# Altium PCB Control Board mk2.PcbDoc
Units mm, origin at the board's own origin, x right, y up, seen from the top; angles counter-clockwise.
Board outline 89 x 55 mm, 2 copper layers (Top Layer, Bottom Layer); 24 components, 21 nets, 99 pads, 7 vias.
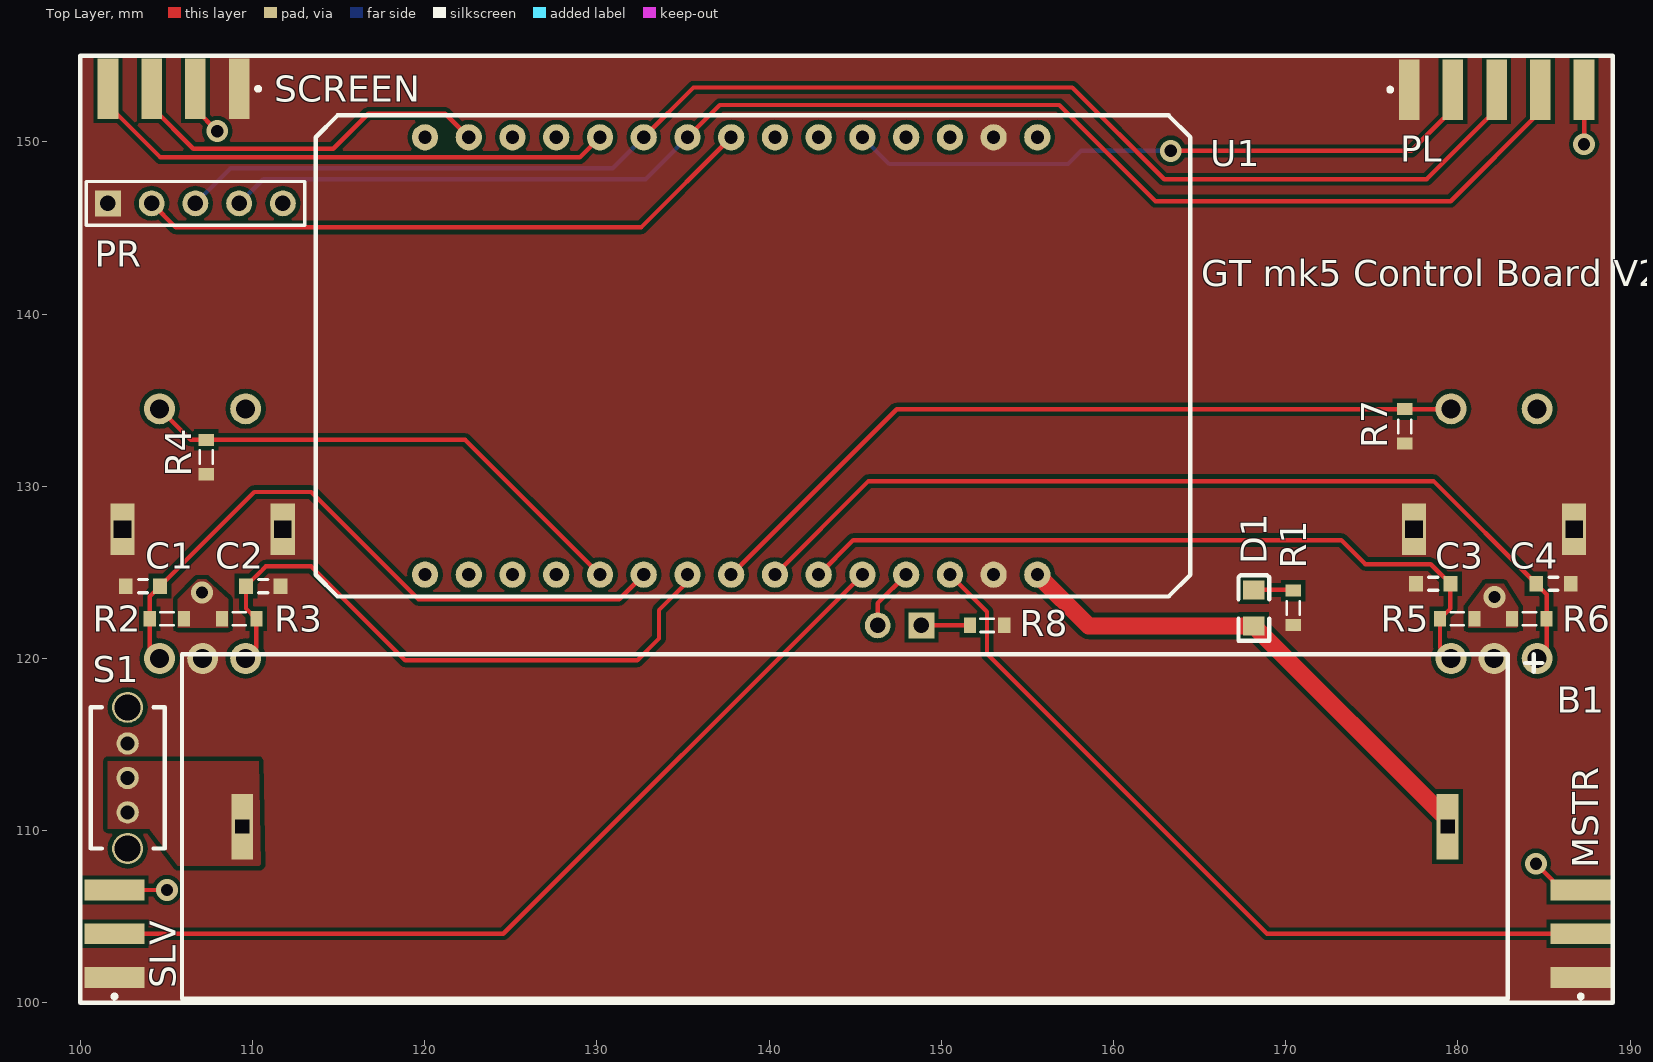
[diagram p0: Top Layer view]
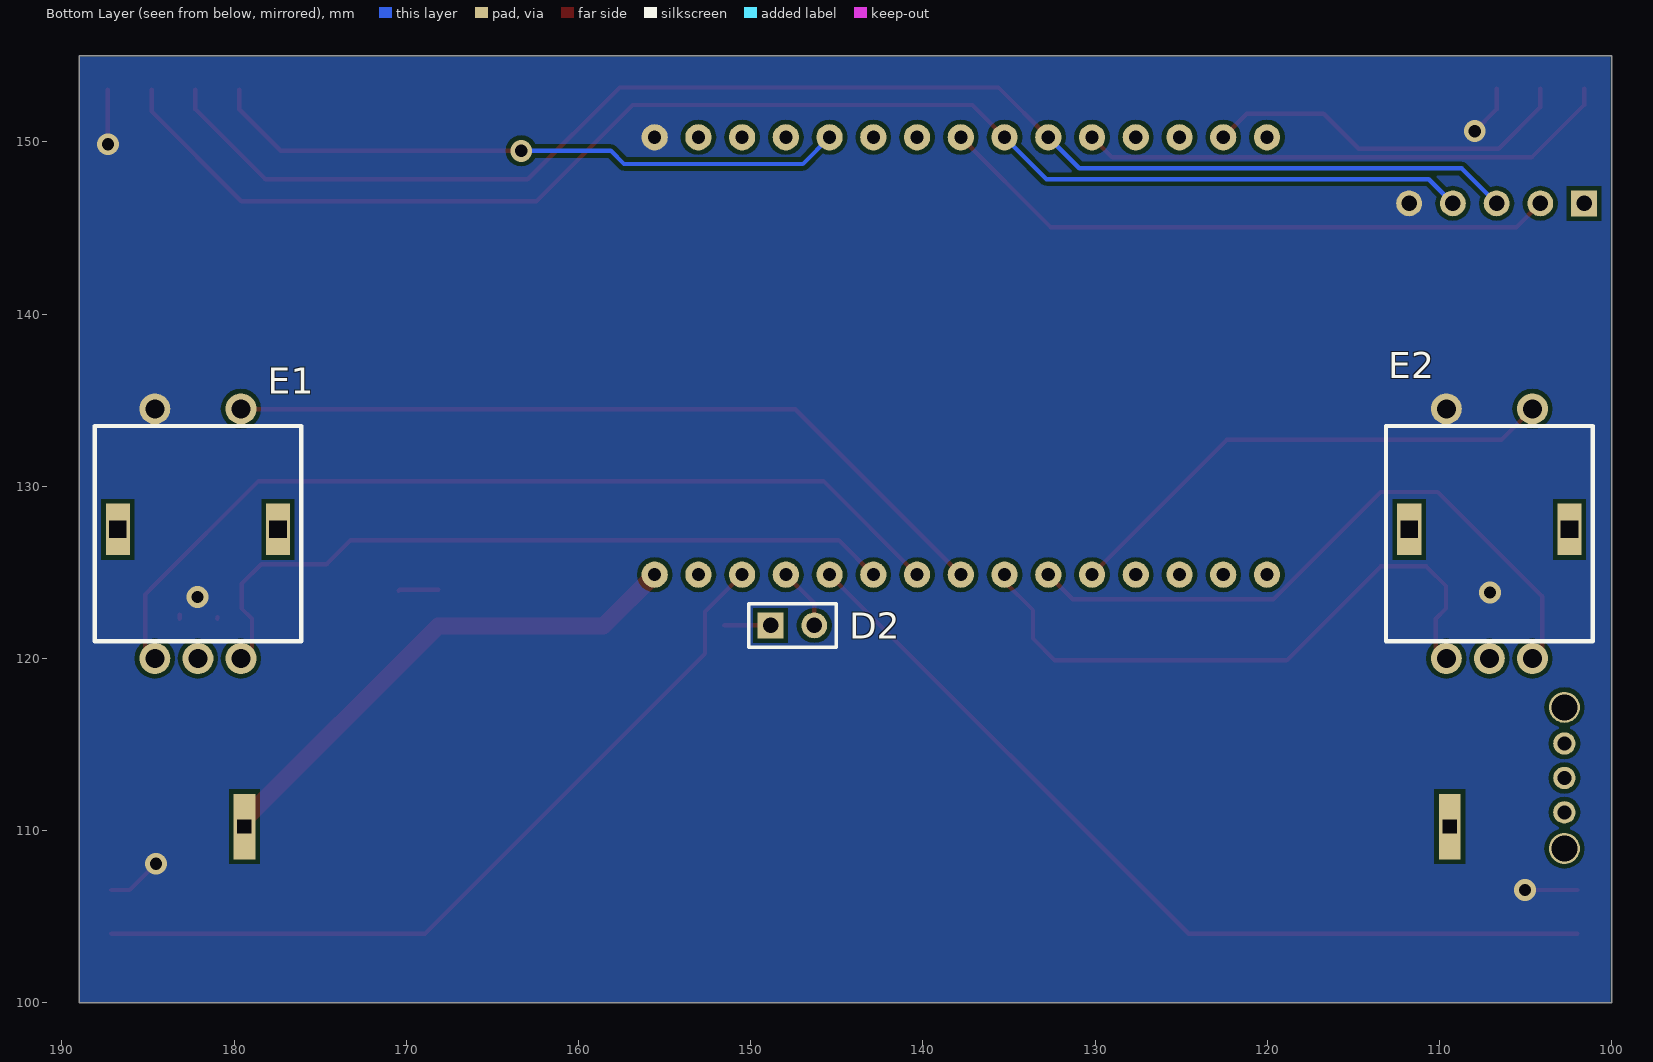
[diagram p1: Bottom Layer view, seen from below]

## Layer stack, top to bottom
Top Solder: solder mask 0.0102, Solder Resist, Dk 3.5
Top Layer: signal copper 0.0356
Dielectric 1: dielectric 0.32, FR-4, Dk 4.8
Bottom Layer: signal copper 0.0356
Bottom Solder: solder mask 0.0102, Solder Resist, Dk 3.5

## Board outline
100,100 100,155 189,155 189,100

## Design rules (kind name [scope] priority, off if disabled: settings)
Clearance Clearance_1 [All] p1: gap=0.254
Clearance [All] p2: gap=0.254
PlaneConnect [All] p1: planeconnectstyle=Relief reliefexpansion=0.508 reliefentries=4 reliefconductorwidth=0.508 reliefairgap=0.254
PolygonConnect [All] p1: connectstyle=Direct reliefconductorwidth=0.254 reliefentries=4 polygonreliefangle="90 Angle" airgapwidth=0.254
RoutingVias [All] p1: holewidth=0.711 width=1.27 viastyle="Through Hole" minholewidth=0.711 minwidth=1.27 maxholewidth=0.711 maxwidth=1.27
SolderMaskExpansion [All] p1: expansion=0.102
Width [All] p1: maxlimit=1 minlimit=0.254 preferedwidth=0.254
29 further rules are at their usual default settings.

## Components (designator, comment, footprint, x,y, rotation, side; value= is the part's Value field where it differs from the comment)
B1 "NiMH Holder" "NiMH Holder" 109.401,110.236 r0 top locked
C1 "Cap Semi" "0603 Cap Long Boi" 103.632,124.206 r180 top
C2 "Cap Semi" "0603 Cap Long Boi" 110.617,124.206 r180 top
C3 "Cap Semi" "0603 Cap Long Boi" 178.562,124.333 r180 top
C4 "Cap Semi" "0603 Cap Long Boi" 185.547,124.333 r180 top
D1 "LED2" LTST-C171TBKT 168.148,122.936 r90 top
D2 "Header 2" HDR1X2 148.844,121.92 r180 bottom
E1 "EN11-HSM1AF15" EN11-HSM1AF15 184.6,134.5 r180 bottom locked
E2 "EN11-HSM1AF15" EN11-HSM1AF15 109.6,134.5 r180 bottom locked
MSTR "Header 3" "3 Pin Side Mount" 187.134,101.473 r90 top (schematic designator "CL MSTR")
PL "Header 5" "5 Pin Side Mount" 177.165,153.035 r0 top
PR "Header 5" HDR1X5 101.6,146.431 r0 top
R1 "Res3" "0603 Res Long Boi - duplicate" 170.434,122.936 r90 top
R2 "Res3" "0603 Res Long Boi - duplicate" 105.029,122.301 r0 top
R3 "Res3" "0603 Res Long Boi - duplicate" 109.22,122.301 r180 top
R4 "Res3" "0603 Res Long Boi - duplicate" 107.315,131.699 r90 top
R5 "Res3" "0603 Res Long Boi - duplicate" 179.959,122.301 r0 top
R6 "Res3" "0603 Res Long Boi - duplicate" 184.15,122.301 r180 top
R7 "Res3" "0603 Res Long Boi - duplicate" 176.911,133.477 r90 top
R8 "Res3" "0603 Res Long Boi - duplicate" 152.654,121.92 r180 top
S1 "OS102011MS2QN1" OS102011MS2QN1 102.743,115.062 r270 top
SCREEN "Header 4" "4 Pin Side Mount" 109.22,153.082 r180 top
SLV "Header 3" "3 Pin Side Mount" 101.981,101.473 r90 top (schematic designator "CL SLV")
U1 "ESP32 DEVKIT V1" "ESP32 DEVKIT V1" 155.575,150.268 r270 top

## Footprints (in the part's own frame and the unit in brackets; to place one, negate y for a bottom-side part, rotate by r counter-clockwise, add the part's x,y. Pads: shape width x height; smd on the part's side, far side on the other; paste and mask are expansions set on the pad)
"3 Pin Side Mount" [mm]
  rect 1.2x3.5 smd: 1(0,0) 2(2.54,0) 3(5.08,0)
  silkscreen extent -1.2,-0.1 -1,0.1
"4 Pin Side Mount" [mm]
  rect 1.2x3.5 smd: 1(0,0) 2(2.54,0) 3(5.08,0) 4(7.62,0)
  silkscreen extent -1.2,-0.1 -1,0.1
"5 Pin Side Mount" [mm]
  rect 1.2x3.5 smd: 1(0,0) 2(2.54,0) 3(5.08,0) 4(7.62,0) 5(10.16,0)
  silkscreen extent -1.2,-0.1 -1,0.1
"0603 Cap Long Boi" [mm]
  rect 0.8x0.9 smd: 1(-1,0) 2(1,0)
  silkscreen extent -0.25,-0.38 0.25,0.38
"0603 Res Long Boi - duplicate" [mm]
  rect 0.7x0.9 smd: 1(-1,0) 2(1,0)
  silkscreen extent -0.38,-0.38 0.38,0.38
EN11-HSM1AF15 [mm]
  round 1.8 hole 1.1: 1(0,-14.5) 2(2.5,-14.5) 3(5,-14.5) 4(0,0) 5(5,0)
  rect 1.4x3 hole 1 square: 6(-2.15,-7) 6(7.15,-7)
  silkscreen extent -3.5,-13.5 8.5,-1
"ESP32 DEVKIT V1" [mil]
  round 60 hole 30: 1(0,0) 2(0,-100) 3(0,-200) 4(0,-300) 5(0,-400) 6(0,-500) 7(0,-600) 8(0,-700) 9(0,-800) 10(0,-900) 11(0,-1000) 12(0,-1100) 13(0,-1200) 14(0,-1300) 15(0,-1400) 16(1000,-1400) 17(1000,-1300) 18(1000,-1200) 19(1000,-1100) 20(1000,-1000) 21(1000,-900) 22(1000,-800) 23(1000,-700) 24(1000,-600) 25(1000,-500) 26(1000,-400) 27(1000,-300) 28(1000,-200) 29(1000,-100) 30(1000,0)
  silkscreen extent -50,-1650 1050,350
HDR1X2 [mm] "Connector; Header; 2 Position"
  rect 1.5x1.5 hole 0.9: 1(0,0)
  round 1.5 hole 0.9: 2(2.54,0)
  silkscreen extent -1.27,-1.27 3.81,1.27
HDR1X5 [mm] "Connector; Header; 5 Position"
  rect 1.5x1.5 hole 0.9: 1(0,0)
  round 1.5 hole 0.9: 2(2.54,0) 3(5.08,0) 4(7.62,0) 5(10.16,0)
  silkscreen extent -1.27,-1.27 11.43,1.27
LTST-C171TBKT [mm] "LED Water Clear InGaN Blue"
  rect 1.1x1.25 smd: 1(-1.05,0) 2(1.05,0)
  silkscreen extent -1.91,-0.89 1.91,0.89
"NiMH Holder" [mm]
  rect 1.27x3.81 hole 0.8 square: 1(70,0) 2(0,0)
  silkscreen extent -3.5,-10 75.5,10
OS102011MS2QN1 [mm]
  round 1.3 hole 0.8: 1(0,0) 2(2,0) 3(4,0)
  round 1.8 hole 1.5: 4(-2.1,0) 4(6.1,0)
  silkscreen extent -2.1,-2.15 6.1,2.15

## Part data
C1 C2 C3 C4: "Capacitor (Semiconductor SIM Model)"
D1: "Typical RED, GREEN, YELLOW, AMBER GaAs LED"
D2: "Header, 2-Pin"
MSTR SLV: "Header, 3-Pin"
PL PR: "Header, 5-Pin"
R1 R2 R3 R4 R5 R6 R7 R8: "Resistor"
SCREEN: "Header, 4-Pin"

## Via types
v1: diameter 1.27, hole 0.711, Top Layer to Bottom Layer, 7 vias

## Nets (pads, with @x,y where several pads share a name; then routed paths per layer and width w, separated by ;. In a path a pad name is that pad's centre, name@x,y a point inside that pad or via, vN(x,y) a via of type N, cw(c..) or ccw(c..) an arc to the next point about the centre after c; other vN are vias at no path point)
!PL: PL.4 PR.4 U1.9 | length 83.7
  Top Layer w0.254: U1.9 137.133,152.146 156.845,152.146 162.433,146.558 179.578,146.558 184.785,151.765 PL.4
  Bottom Layer w0.254: PR.4 110.617,147.828 132.815,147.828 U1.9
"A CLK": C2.2 E2.1 R3.1 U1.22 | length 36.4
  Top Layer w0.254: E2.1 110.22,120.62 R3.1 109.617,122.904 C2.2 110.76,125.349 113.411,125.349 118.872,119.888 132.334,119.888 133.604,121.158 133.604,122.809 135.255,124.46 U1.22
"A DT": C1.1 E2.3 R2.1 U1.21 | length 38.2
  Top Layer w0.254: E2.3 104.029,120.571 R2.1 104.029,123.603 C1.1 110.093,129.667 113.411,129.667 119.634,123.444 131.291,123.444 U1.21
"A SW": E2.5 R4.2 U1.20 | length 29.6
  Top Layer w0.254: E2.5 106.401,132.699 R4.2 122.344,132.699 U1.20
"B CLK": C4.2 E1.1 R6.1 U1.24 | length 53.7
  Top Layer w0.254: U1.24 145.769,130.302 178.578,130.302 C4.2 185.15,123.73 R6.1 185.15,120.55 E1.1
"B DT": C3.1 E1.3 R5.1 U1.25 | length 43.4
  Top Layer w0.254: U1.25 144.88,126.873 173.228,126.873 174.625,125.476 178.419,125.476 C3.1 179.562,122.904 R5.1 178.959,120.641 E1.3
"B SW": E1.5 R7.2 U1.23 | length 45.8
  Top Layer w0.254: U1.23 147.404,134.477 R7.2 E1.5@179.577,134.477
"CL MSTR": MSTR.2 U1.28 | length 46.7
  Top Layer w0.254: U1.28 152.654,122.709 152.654,120.269 168.91,104.013 MSTR.2
"CL SLV": SLV.2 U1.26 | length 52.1
  Top Layer w0.254: SLV.2 124.56,104.013 U1.26
"CONECTION LED": D2.2 U1.27 | length 3.6
  Top Layer w0.254: D2.2 146.304,123.217 U1.27
CP: PL.3 PR.3 U1.10 | length 83.4
  Top Layer w0.254: U1.10 135.609,153.162 157.607,153.162 162.941,147.828 178.181,147.828 182.245,151.892 PL.3
  Bottom Layer w0.254: PR.3 108.712,148.463 130.91,148.463 U1.10
GND: C1.2 C2.1 C3.2 C4.1 E1.2 E1.6 E2.2 E2.6 MSTR.1 PL.1 PR.1 R1.1 R4.1 R7.1 R8.1 S1.1 SCREEN.1 SLV.1 U1.2 U1.29
NetB1_2: B1.2 S1.2 S1.3
NetD1_2: D1.2 R1.2 | length 2.3
  Top Layer w0.254: D1.2 170.384,123.986 R1.2
NetD2_1: D2.1 R8.2 | length 2.7
  Top Layer w0.254: D2.1 R8.2@151.527,121.92
"Q L": PL.2 U1.5 | length 37.4
  Top Layer w0.254: v1(163.322,149.479) 177.292,149.479 179.705,151.892 PL.2
  Bottom Layer w0.254: U1.5 146.966,148.717 157.353,148.717 158.115,149.479 v1(163.322,149.479)
"Q R": PR.2 U1.8 | length 36.4
  Top Layer w0.254: PR.2 105.537,145.034 132.561,145.034 U1.8
"SCREEN SCL": SCREEN.3 U1.14 | length 21.9
  Top Layer w0.254: SCREEN.3 104.14,152.019 106.553,149.606 114.681,149.606 116.713,151.638 121.185,151.638 U1.14
"SCREEN SDA": SCREEN.4 U1.11 | length 31.3
  Top Layer w0.254: SCREEN.4 101.6,152.146 104.648,149.098 129.005,149.098 U1.11
VBAT: B1.1 D1.1 U1.30 | length 29.7
  Top Layer w1: U1.30 158.557,121.886 D1.1 B1.1@179.401,110.633
VCC: E1.4 E2.4 MSTR.3 PL.5 PR.5 R2.2 R3.2 R5.2 R6.2 SCREEN.2 SLV.3 U1.1 | length 12.8
  Top Layer w0.254: SLV.3 v1(105.029,106.553) ; SCREEN.2 106.68,151.892 v1(107.95,150.622) ; R5.2@180.959,122.412 R5.2 R5.2@180.975,122.301 ; R6.2 R6.2@183.15,122.539 ; v1(184.531,108.077) 186.055,106.553 MSTR.3 ; v1(187.325,149.86) PL.5
  other v1: 182.118,123.571 107.061,123.825
pads on no net: S1.4 U1.3 U1.4 U1.6 U1.7 U1.12 U1.13 U1.15 U1.16 U1.17 U1.18 U1.19

## Polygon pours and split planes (outlines as drawn)
VCC on Top Layer "VCC" (solid, pour order 11): 105.664,121.793 105.664,123.444 106.807,124.587 107.315,124.587 108.585,123.444 108.585,121.793
VCC on Top Layer "VCC" (solid, pour order 9): 180.594,121.793 180.594,122.809 180.594,122.978 181.61,124.333 182.658,124.333 183.515,122.961 183.515,121.793
NetB1_2 on Top Layer "Bat-" (solid, pour order 3): 101.6,114.046 110.363,114.046 110.49,107.95 107.95,107.95 105.664,107.95 104.013,110.109 101.6,110.109
GND on Top Layer "GND" (solid, pour order 15): 100.076,154.94 188.976,154.94 188.976,100.076 100.076,100.076
VCC on Bottom Layer "VCC" (solid, pour order 17): 100.076,154.94 100.076,100.076 188.976,100.076 188.976,154.94

## Silkscreen, mask and mechanical layers (free items; w line width, h text height)
Top Overlay:
  the board outline again, w0.254
  text "GT mk5 Control Board V2" at 165.1,141.605 h1.52